# Altium PCB mcu.PcbDoc
Units mil, origin at the board's own origin, x right, y up, seen from the top; angles counter-clockwise.
Board outline 2849.19 x 1676.42 mil, 4 copper layers (Top Layer, GND, VDD, Bottom Layer), stack 23.756 mil thick; 36 components, 27 nets, 174 pads, 45 vias.
Unrouted connection lines stored in the file: 3.
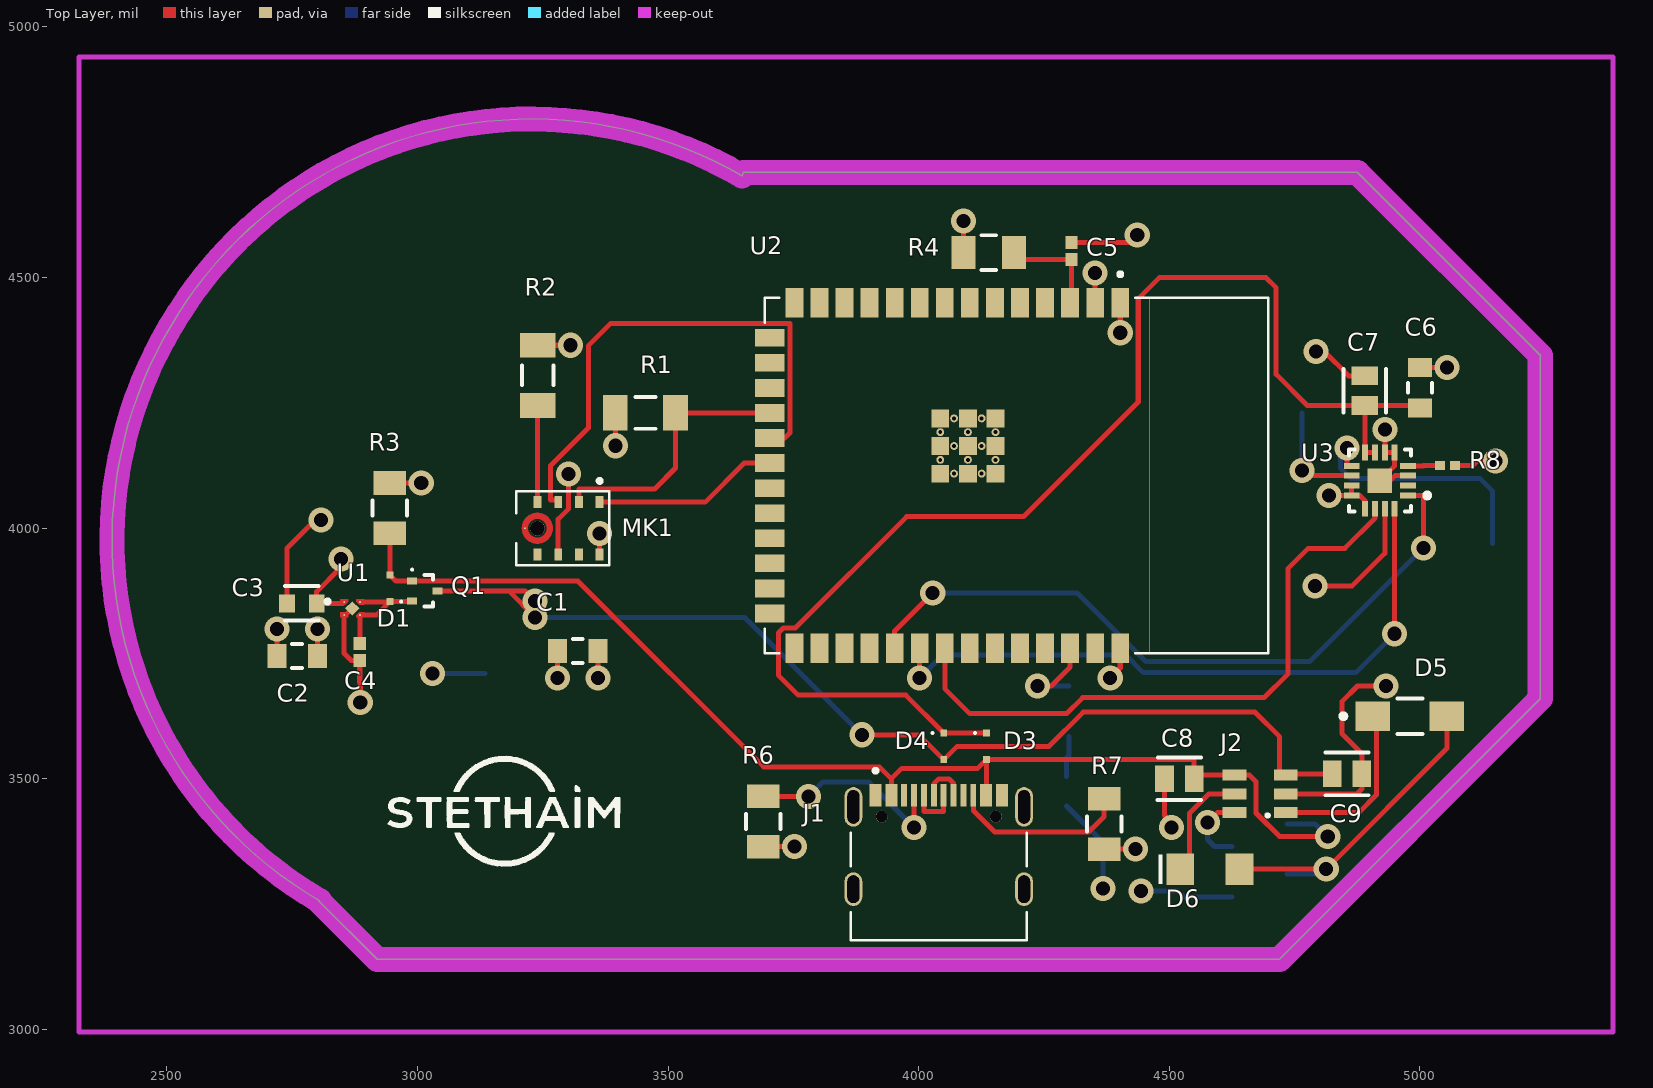
[diagram p0: Top Layer view]
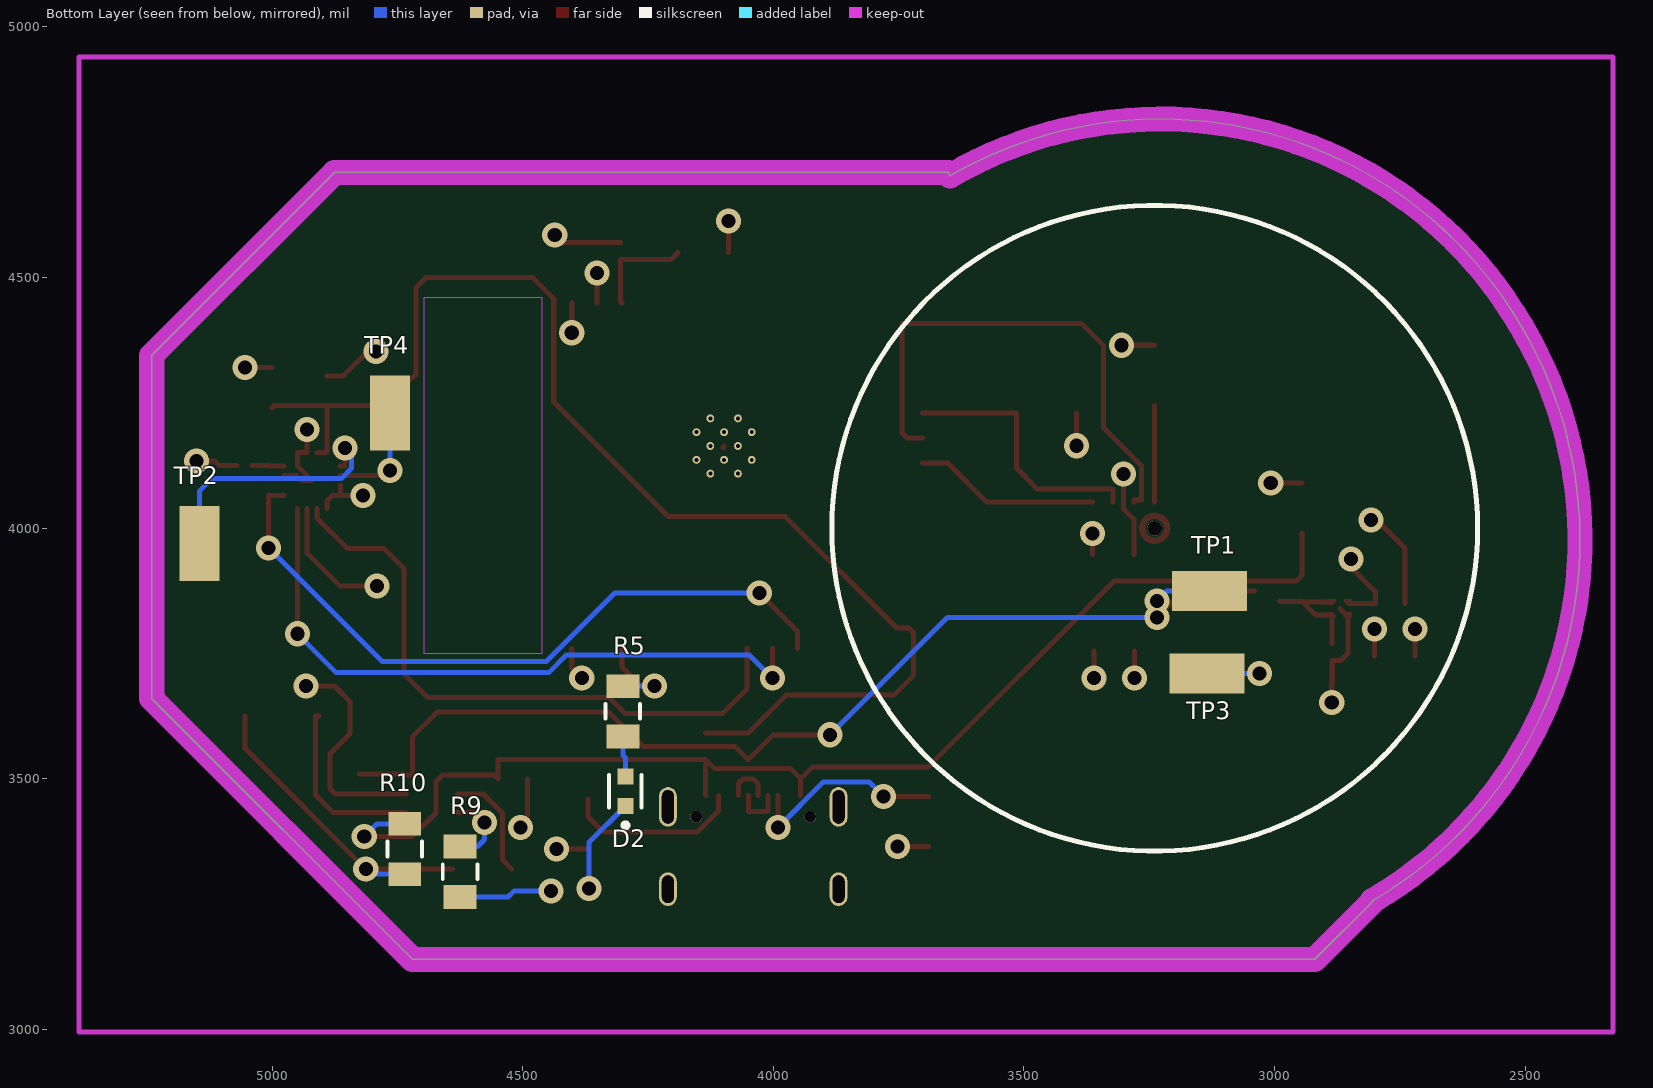
[diagram p1: Bottom Layer view, seen from below]
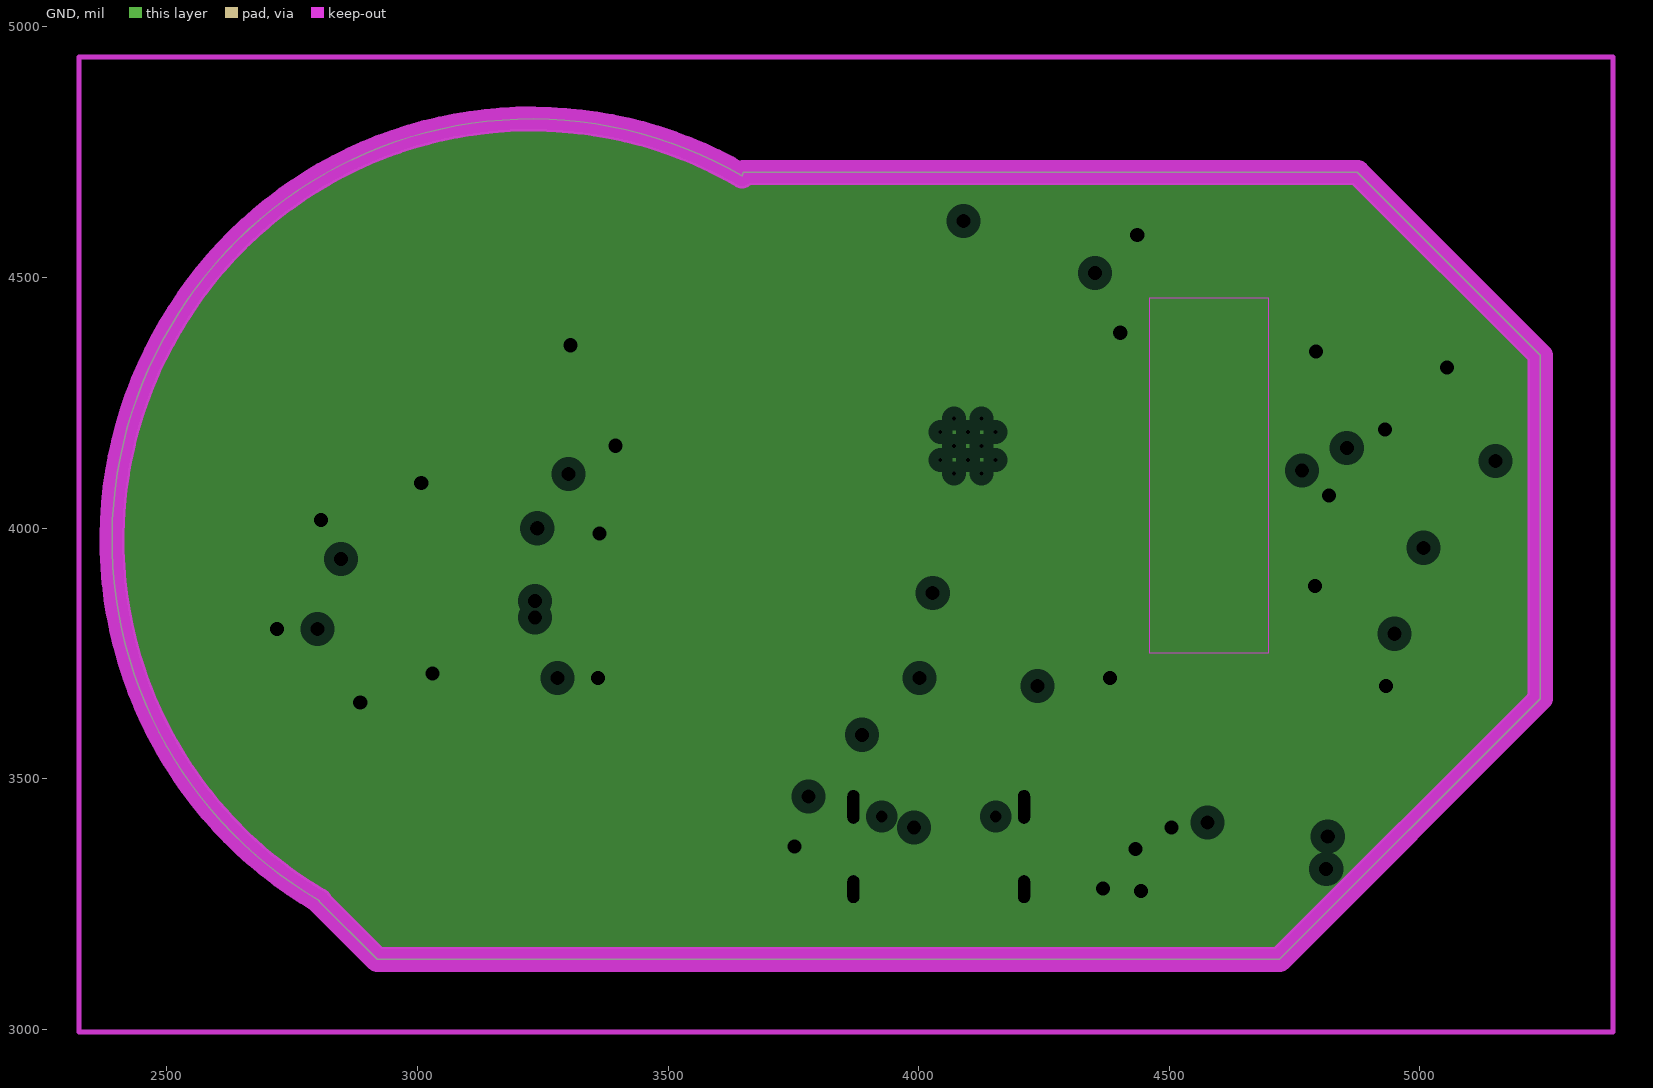
[diagram p2: GND, clearances drawn from the general rule]
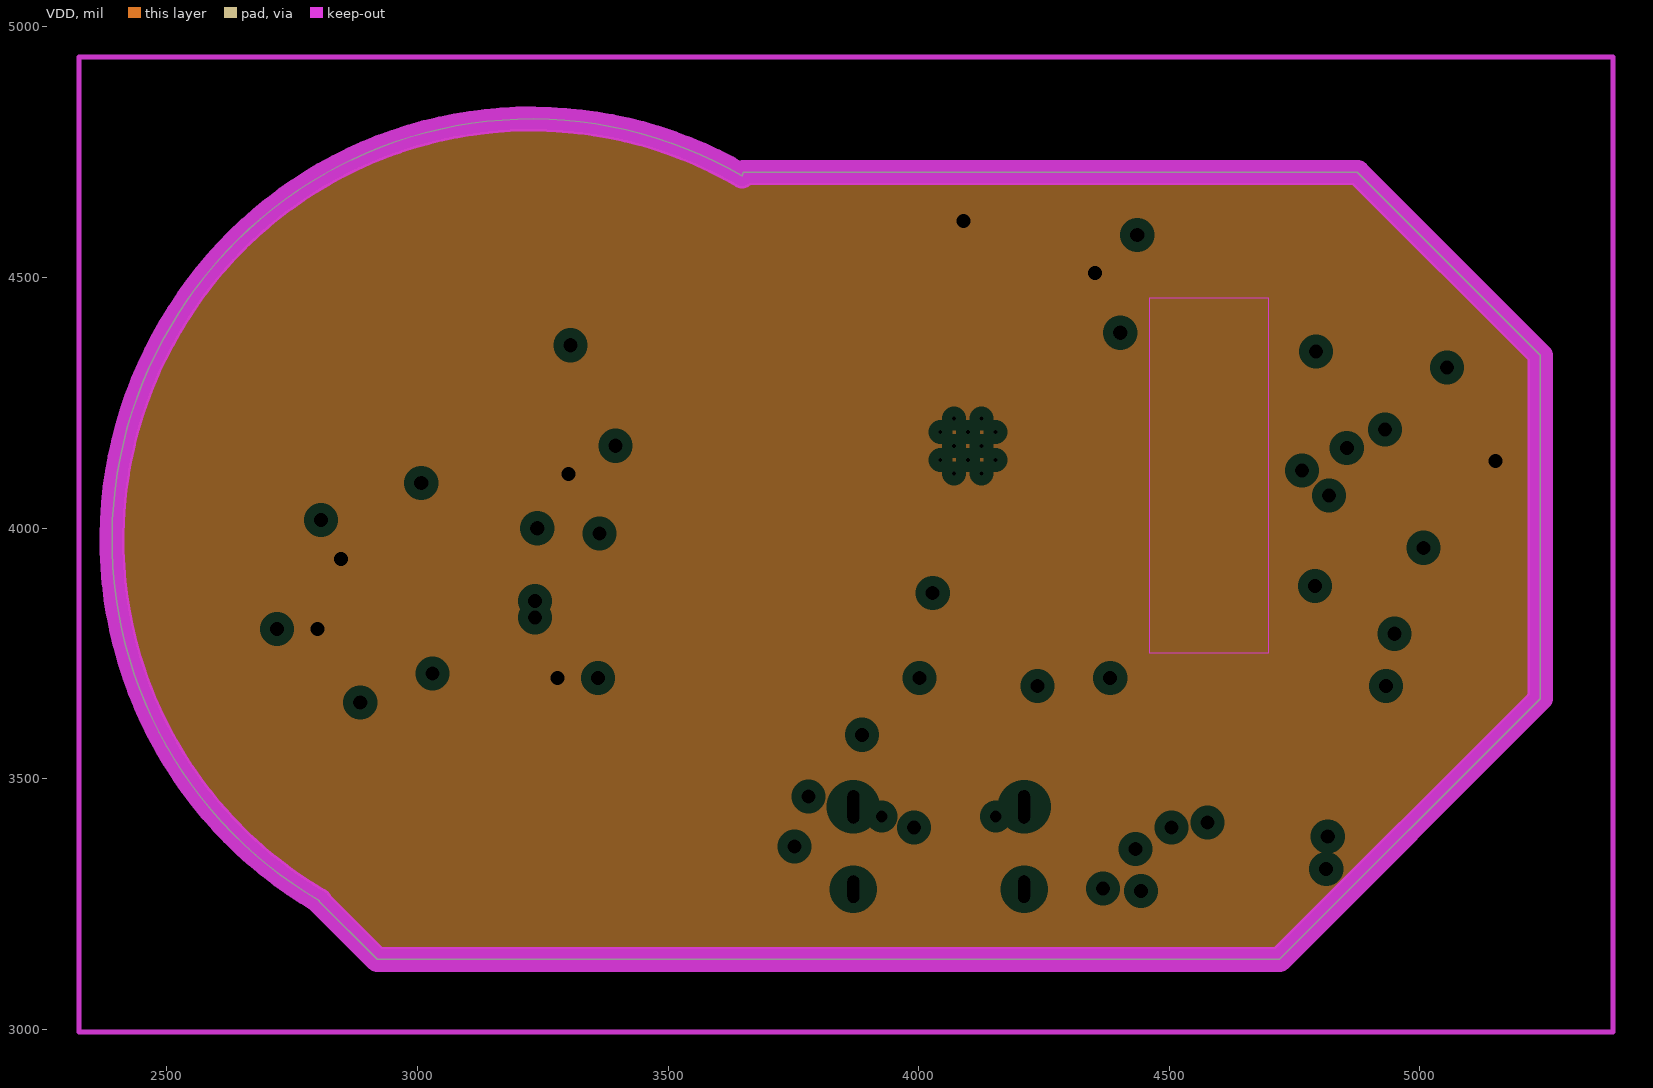
[diagram p3: VDD, clearances drawn from the general rule]
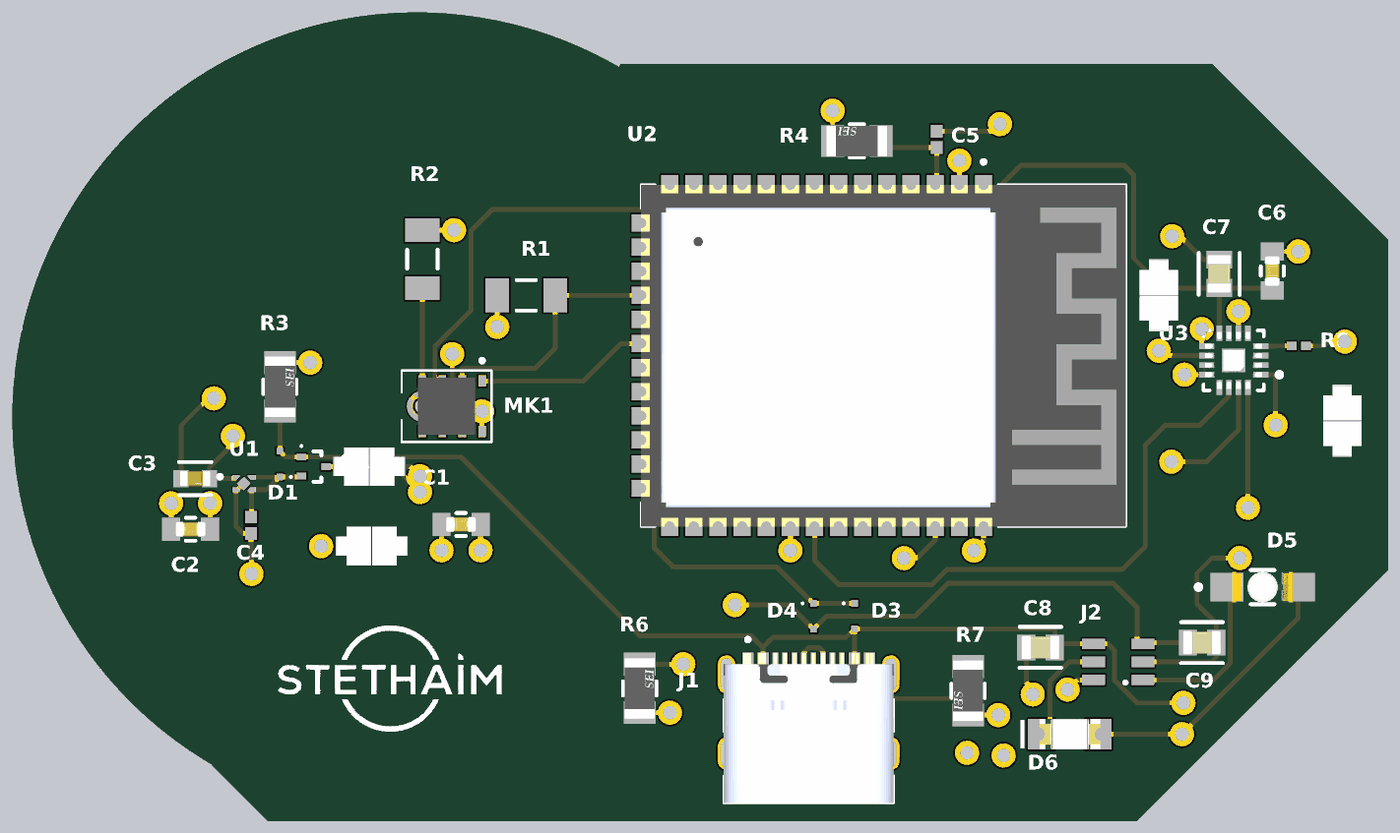
[diagram p4: 3D render of the assembled board from above, using the file's embedded part models]
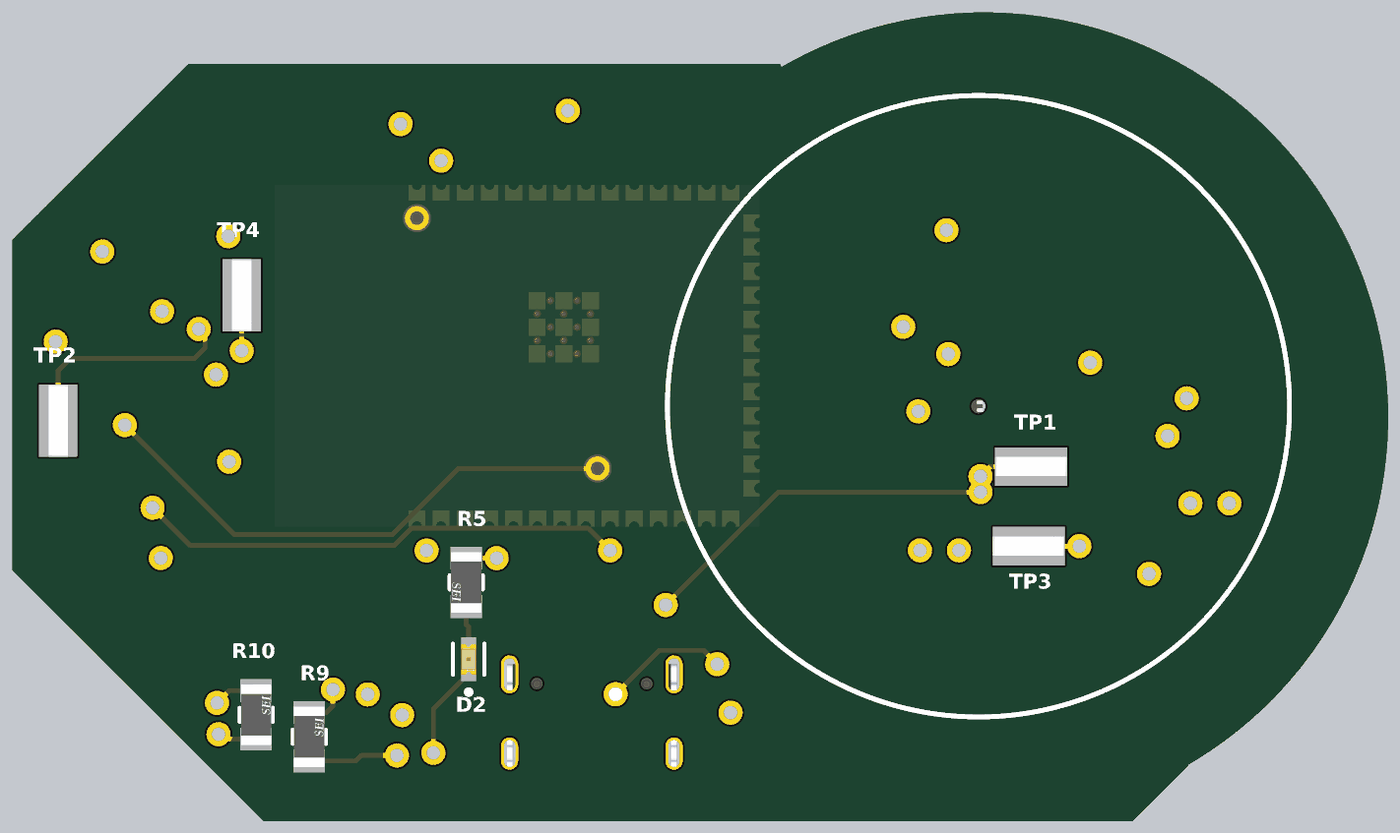
[diagram p5: 3D render of the assembled board from below, using the file's embedded part models]

## Layer stack, top to bottom
Top Solder: solder mask 0.4, Solder Resist, Dk 3.5
Top Layer: signal copper 1.4
Dielectric 2: prepreg 2.8, PP-006, Dk 4.1
GND: plane copper 1.378, net GND
Dielectric 1: dielectric 12.6, FR-4, Dk 4.8
VDD: plane copper 1.378, net VDD
Dielectric 3: prepreg 2.8, PP-006, Dk 4.1
Bottom Layer: signal copper 1.4
Bottom Solder: solder mask 0.4, Solder Resist, Dk 3.5

## Board outline
2920,3140 2804.32,3255.68 2804.32,3257.09 cw(c3224.32,3977.09) 2507.73,4402.89 cw(c3227.73,3982.89) 3647.73,4702.89 3650,4710 4270,4710 4875,4710 5240,4345 5240,3660 5235,3655 4720,3140 3675,3140

## Design rules (kind name [scope] priority, off if disabled: settings)
Clearance Clearance_1 [OnMid vs OnMid] p1: gap=5 ignorepadtopadclearanceinfootprint=FALSE sourcerule=37 cellrowname=All cellrowtype=0 cellcolname=All cellcoltype=0 innerlayers=TRUE
Clearance Clearance_2 [(ExistsOnLayer('Top Layer') Or ExistsOnLayer('Bottom Layer')) vs (ExistsOnLayer('Top Layer') Or ExistsOnLayer('Bottom Layer'))] p2: gap=5 ignorepadtopadclearanceinfootprint=FALSE sourcerule=37 cellrowname=All cellrowtype=0 cellcolname=All cellcoltype=0 outerlayers=TRUE
Clearance [All] p3: gap=10 ignorepadtopadclearanceinfootprint=FALSE ismatrix=TRUE
PlaneClearance [All] p1: clearance=20
PlaneConnect [All] p1: planeconnectstyle=Relief reliefexpansion=20 reliefentries=4 reliefconductorwidth=10 reliefairgap=10
PolygonConnect [All] p1: connectstyle=Relief reliefconductorwidth=10 reliefentries=4 polygonreliefangle="90 Angle" airgapwidth=10
RoomDefinition mcu [InComponentClass('mcu')] p1: confinementstyle=ConfineIn formatcopy=TRUE lockcomponents=FALSE outline 2315,2985 5390,2985 5390,4945 2315,4945
RoutingVias [All] p1: holewidth=28 width=50 viastyle="Through Hole" minholewidth=28 minwidth=50 maxholewidth=28 maxwidth=50
SolderMaskExpansion [All] p1: expansion=4 istentingtop=FALSE
Width [All] p1: maxlimit=10 minlimit=10 preferedwidth=10
28 further rules are at their usual default settings.

## Components (designator, comment, footprint, x,y, rotation, side; value= is the part's Value field where it differs from the comment)
C1 "100nF" FP-CGA3E-0_3-0_1-IPC_A 3320,3755 r0 top
C2 "100nF" FP-CGA3E-0_3-0_1-IPC_A 2760,3745 r180 top
C3 "22uF" FP-CC0603-DC-MFG 2769.53,3850 r180 top
C4 "C0402 1uF" CAPC1005X60X30NL05T10 2885,3753.07 r90 top
C5 "C0402 1uF" CAPC1005X60X30NL05T10 4305,4553.07 r270 top
C6 "100nF" FP-CGA3E-0_3-0_1-IPC_A 5000,4280.36 r90 top
C7 "C0805 10uF" FP-C0805C-DG-MFG 4890,4274.53 r90 top value=10uF
C8 "C0805 10uF" FP-C0805C-DG-MFG 4520,3500 r180 top value=10uF
C9 "C0805 10uF" FP-C0805C-DG-MFG 4854.53,3510 r0 top value=10uF
D1 "BAS52-02V" INF-SC79_V 2945,3880 r90 top
D2 "GPIO2" FP-LTST-C190KRKT-MFG 4295,3475.47 r90 bottom
D3 "BAS52-02V" INF-SC79_V 4135,3565 r270 top
D4 "BAS52-02V" INF-SC79_V 4050,3565 r270 top
D5 "PTD3216CGCK" FP-APTD3216CGCK-MFG 4980,3625 r0 top
D6 "150120BS75000" WL-SMCW_1206_150120xx75000 4580.94,3320 r0 top
J1 "TYPE-C-31-M-12" HRO_TYPE-C-31-M-12 4040,3280 r0 top
J2 "TP4057" SOT23-6 4681.19,3470 r90 top
MK1 "INMP441ACEZ-R7" MIC_INMP441ACEZ-R7 3290,4000 r0 top
Q1 "NTA4151PT1G" ONSC-SC-75-3-463-01_V 3015,3875 r0 top
R1 "100K" RESC3116X65X40ML10T20 3454.96,4230 r0 top
R2 "100K" RESC3116X65X40ML10T20 3240,4305 r270 top
R3 "1206 5K10" FP-RMCF1206-IPC_C 2945,4040.22 r90 top
R4 "1206 5K10" FP-RMCF1206-IPC_C 4139.78,4550 r180 top
R5 "1206 5K10" FP-RMCF1206-IPC_C 4300,3634.78 r270 bottom
R6 "1206 5K10" FP-RMCF1206-IPC_C 3690,3415 r90 top
R7 "1206 5K10" FP-RMCF1206-IPC_C 4370,3410 r270 top
R8 "RC0402FR-07634KL" RESC1005X40X25LL05T10 5055,4125 r180 top
R9 "1206 5K10" FP-RMCF1206-IPC_C 4625,3314.78 r90 bottom
R10 "1206 5K10" FP-RMCF1206-IPC_C 4735,3360.22 r90 bottom
TP1 "5019" KEYSTONE_5019 3130,3875 r180 bottom
TP2 "5019" KEYSTONE_5019 5145,3970 r270 bottom
TP3 "BATN" KEYSTONE_5019 3135,3710 r180 bottom
TP4 "5019" KEYSTONE_5019 4765,4230 r90 bottom
U1 "NCP167BMX330TBG" VREG_NCP167BMX330TBG 2870,3840 r0 top
U2 "ESP32-S3-WROOM-1-N8" XCVR_ESP32-S3-WROOM-1-N8 4195,4105 r270 top
U3 "MAX98357AETE+T" FP-T1633-4-MFG 4920,4095 r180 top

## Footprints (in the part's own frame and the unit in brackets; to place one, negate y for a bottom-side part, rotate by r counter-clockwise, add the part's x,y. Pads: shape width x height; smd on the part's side, far side on the other; paste and mask are expansions set on the pad)
CAPC1005X60X30NL05T10 [mm] "Chip Capacitor, 2-Leads, Body 1.00x0.50mm, IPC Medium Density"
  rect 0.66x0.62 smd: 1(-0.43,0) 2(0.43,0)
  body extent -0.53,-0.28 0.53,0.27, height 0.6
FP-APTD3216CGCK-MFG [mm]
  rect 1.75x1.5 smd paste+0 mask+0: 1(-1.875,0) 2(1.875,0)
  silkscreen extent -3.5,-0.9 0.62,0.9, body extent -2.85,-1 2.85,1, height 0.25
FP-C0805C-DG-MFG [mm]
  rect 0.95x1.35 smd paste+0 mask+0: 1(-0.75,0) 2(0.75,0)
  silkscreen extent -1.11,-1.08 1.1,1.08, body extent -1.4,-0.85 1.4,0.85, height 0.25
FP-CC0603-DC-MFG [mm]
  rect 0.8x0.9 smd paste+0 mask+0: 1(-0.75,0) 2(0.75,0)
  silkscreen extent -0.85,-0.87 0.85,0.87, body extent -1.43,-0.82 1.43,0.82, height 0.25
FP-CGA3E-0_3-0_1-IPC_A [mm]
  rect 0.956x1.206 smd paste+0 mask+0: 1(-1.025,0) 2(1.025,0)
  silkscreen extent -0.25,-0.6 0.25,0.6, body extent -2,-1.1 2,1.1, height 0.25
FP-LTST-C190KRKT-MFG [mm]
  rect 0.8x0.8 smd paste+0 mask+0: 1(-0.75,0) 2(0.75,0)
  silkscreen extent -1.85,-0.83 0.83,0.83, body extent -0.8,-0.4 0.8,0.4, height 0.9
FP-RMCF1206-IPC_C [mil]
  rect 47.39x65.28 smd paste+0 mask+0: 1(-50.22,0) 2(50.22,0)
  silkscreen extent -15,-34 15,34, body extent -78,-38 78,38, height 10
FP-T1633-4-MFG [mm]
  rect 0.8x0.3 smd paste+0 mask+0: 1(-1.425,0.75) 2(-1.425,0.25) 3(-1.425,-0.25) 4(-1.425,-0.75) 9(1.425,-0.75) 10(1.425,-0.25) 11(1.425,0.25) 12(1.425,0.75)
  rect 0.3x0.8 smd paste+0 mask+0: 5(-0.75,-1.425) 6(-0.25,-1.425) 7(0.25,-1.425) 8(0.75,-1.425) 13(0.75,1.425) 14(0.25,1.425) 15(-0.25,1.425) 16(-0.75,1.425)
  rect 1.23x1.23 smd paste+0 mask+0: 17(0,0)
  silkscreen extent -2.53,-1.58 1.58,1.57, body extent -1.92,-1.92 1.92,1.92, height 0.25
HRO_TYPE-C-31-M-12 [mm]
  rect 0.6x1.14 smd mask+0.05: A1_B12(-3.2,4.75) A4_B9(-2.4,4.75) B1_A12(3.2,4.75) B4_A9(2.4,4.75)
  rect 0.3x1.14 smd mask+0.05: A5(-1.25,4.75) A6(-0.25,4.75) A7(0.25,4.75) A8(1.25,4.75) B5(1.75,4.75) B6(0.75,4.75) B7(-0.75,4.75) B8(-1.75,4.75)
  oval 0.9x2 hole 0.6 slot 1.7 at 90 deg: S1(-4.325,4.17) S2(4.325,4.17)
  oval 0.9x1.7 hole 0.6 slot 1.4 at 90 deg: S3(-4.325,0) S4(4.325,0)
  round 0.6 hole 0.6 unplated: ""(-2.89,3.68) ""(2.89,3.68)
  silkscreen extent -4.47,-2.6 4.47,6.1, body extent -4.47,-2.6 4.47,5.31, height 3.31
INF-SC79_V [mm] "SC79, 2-Leads, Body 1.2x0.8 mm"
  rect 0.35x0.35 smd: 1(-0.672,0) 2(0.678,0)
  silkscreen extent -0.72,-0.62 -0.62,-0.53, body extent -0.6,-0.4 0.6,0.4, height 0.59
KEYSTONE_5019 [mm]
  rect 3.8x2.03 smd: TP(0,0)
  body extent -1.91,-1.01 1.91,1.01, height 1.14
MIC_INMP441ACEZ-R7 [mm]
  rect 0.4x0.6 smd paste-1: 1(1.87,1.33) 2(0.82,1.33) 3(-0.23,1.33) 4(-1.28,1.33) 6(-1.28,-1.33) 7(-0.23,-1.33) 8(0.82,-1.33) 9(1.87,-1.33)
  rect 0.1x0.1 smd paste-1 mask+0: 5(-1.92,0)
  round 0.75 hole 0.75 unplated: ""(-1.29,0)
  Top Layer region: 243 vertices and 0 holes, not listed, extent -2.07,-0.78 -0.51,0.78
  silkscreen extent -2.36,-1.88 2.36,2.5, body extent -1.5,-1.5 1.5,1.5, height 1
ONSC-SC-75-3-463-01_V [mil] "SOT23, 3-Leads, Body 1.6x0.8mm, Pitch 0.5mm"
  rect 20x14.02 smd: 1(-25.49,19.69) 2(-25.49,-19.69) 3(25.49,0)
  silkscreen extent -27,-31 16,44, body extent -16,-31 16,31, height 35
RESC1005X40X25LL05T10 [mm] "Chip Resistor, 2-Leads, Body 1.00x0.50mm, IPC High Density"
  rect 0.5x0.45 smd: 1(-0.375,0) 2(0.375,0)
  body extent -0.53,-0.27 0.53,0.28, height 0.4
RESC3116X65X40ML10T20 [mm] "Chip Resistor, 2-Leads, Body 3.10x1.60mm, IPC Low Density"
  rect 1.25x1.8 smd: 1(-1.525,0) 2(1.525,0)
  silkscreen extent -0.5,-0.8 0.5,0.8, body extent -1.6,-0.85 1.6,0.85, height 0.65
SOT23-6 [mm]
  rect 0.55x1.2 smd: 1(-0.95,-1.3) 2(0,-1.3) 3(0.95,-1.3) 4(0.95,1.3) 5(0,1.3) 6(-0.95,1.3)
  silkscreen extent -1.13,-0.41 -1.06,-0.34
VREG_NCP167BMX330TBG [mm]
  rect 0.1x0.1 smd paste-1 mask+0: 1(-0.405,0.325) 2(-0.405,-0.325) 3(0.405,-0.325) 4(0.405,0.325)
  rect 0.52x0.52 smd rot 45 mask+0.05: 5(0,0)
  Top Layer region: 0.6,0.195 0.36,0.195 0.21,0.345 0.21,0.455 0.6,0.455
  Top Layer region: 0.6,-0.455 0.21,-0.455 0.21,-0.345 0.36,-0.195 0.6,-0.195
  Top Layer region: -0.21,-0.345 -0.21,-0.455 -0.6,-0.455 -0.6,-0.195 -0.36,-0.195
  Top Layer region: -0.21,0.345 -0.36,0.195 -0.6,0.195 -0.6,0.455 -0.21,0.455
  silkscreen extent -1.35,0.25 -1.15,0.45
WL-SMCW_1206_150120xx75000 [mm] "SMD Mono-color Chip LED, body 3.2x1.6mm"
  rect 1.4x1.6 smd: 1(-1.5,0) 2(1.5,0)
  silkscreen extent -2.6,-0.75 -2.4,0.75, body extent -1.6,-0.8 1.6,0.8, height 0.68
XCVR_ESP32-S3-WROOM-1-N8 [mm]
  rect 1.5x0.9 smd: 1(-8.75,5.26) 2(-8.75,3.99) 3(-8.75,2.72) 4(-8.75,1.45) 5(-8.75,0.18) 6(-8.75,-1.09) 7(-8.75,-2.36) 8(-8.75,-3.63) 9(-8.75,-4.9) 10(-8.75,-6.17) 11(-8.75,-7.44) 12(-8.75,-8.71) 13(-8.75,-9.98) 14(-8.75,-11.25) 27(8.75,-11.25) 28(8.75,-9.98) 29(8.75,-8.71) 30(8.75,-7.44) 31(8.75,-6.17) 32(8.75,-4.9) 33(8.75,-3.63) 34(8.75,-2.36) 35(8.75,-1.09) 36(8.75,0.18) 37(8.75,1.45) 38(8.75,2.72) 39(8.75,3.99) 40(8.75,5.26)
  rect 0.9x1.5 smd: 15(-6.985,-12.5) 16(-5.715,-12.5) 17(-4.445,-12.5) 18(-3.175,-12.5) 19(-1.905,-12.5) 20(-0.635,-12.5) 21(0.635,-12.5) 22(1.905,-12.5) 23(3.175,-12.5) 24(4.445,-12.5) 25(5.715,-12.5) 26(6.985,-12.5)
  rect 0.9x0.9 smd: 41_1(-1.5,-2.46) 41_2(-2.9,-2.46) 41_3(-0.1,-2.46) 41_4(-2.9,-3.86) 41_5(-1.5,-3.86) 41_6(-0.1,-3.86) 41_7(-2.9,-1.06) 41_8(-1.5,-1.06) 41_9(-0.1,-1.06)
  round 0.4 hole 0.2 mask+0: 41_10(-1.5,-1.76) 41_11(-2.9,-1.76) 41_12(-0.1,-1.76) 41_13(-2.9,-3.16) 41_14(-1.5,-3.16) 41_15(-0.1,-3.16) 41_16(-2.2,-1.06) 41_17(-0.8,-1.06) 41_18(-2.2,-2.46) 41_19(-0.8,-2.46) 41_20(-2.2,-3.86) 41_21(-0.8,-3.86)
  Keep-Out Layer region: 9,6.75 -9,6.75 -9,12.75 9,12.75
  Keep-Out Layer region: 9,6.75 -9,6.75 -9,12.75 9,12.75
  silkscreen extent -10.3,-12.75 9,12.75, body extent -9,-12.75 9,12.75, height 0

## Part data
C1 C2 C6: library part CMP-2000-07546-2, "Cap Ceramic 100nF 50V X7R 10% Pad SMD 0603 +125°C Automotive T/R", Case Code (Imperial)=0603, Case Code (Metric)=1608, Dielectric=X7R, Max Operating Temperature=125°C, Min Operating Temperature=-55°C, Package Quantity=1, Ratings=AEC-Q200, Tolerance=10%, Voltage=50V, Capacitance=100nF, Case/Package=0603, Composition=Ceramic, Depth=0.8mm, Height=0.8mm, Lead Free="Lead Free", Length=1.6mm, Mount="Surface Mount", Packaging="Tape and Reel", Radiation Hardening=No, REACH SVHC="No SVHC", Termination=SMD/SMT, Thickness=0.035inch, Voltage Rating=50V, Voltage Rating (DC)=50V, Weight=7.1E-05oz, Width=0.8mm
C3: library part CMP-2000-06075-2, "CAP CER 22UF 6.3V X5R 0603", Case Code (Imperial)=0603, Case Code (Metric)=1608, Dielectric=X5R, Max Operating Temperature=85°C, Min Operating Temperature=-55°C, Package Quantity=4000, Resistor Type=Ceramic, Tolerance=20%, Voltage Rating=6.3V, Capacitance=22uF, Case/Package=0603, Depth=0.8mm, Halogen Free="Halogen Free", Lead Free="Lead Free", Length=0.063inch, Mount="Surface Mount", Packaging="Tape and Reel", RoHS Compliant=Yes, Termination=SMD/SMT, Thickness=0.035inch, Voltage Rating (DC)=6.3V, Weight=7.1E-05oz, Width=0.031inch
C4 C5: library part CMP-2008-02056-1, Manufacturer=Kemet, Part Number=C0402C105M8PACTU
C7 C8 C9: library part CMP-2007-03243-2, "CAP CER 10UF 10V X5R 0805", 3DS Part Number=220-00001, Capacitance=10uF, Manufacturer=Kemet, Manufacturer Part Number=C0805C106K8PACTU, Package=C0805C-DG, Temperature="-55°C to +85°C", Temperature Characteristic=X5R, Temperature Coefficient=15%, Temperature Range High=+85°C, Temperature Range Low=-55°C, Tolerance=10%, Voltage=10V, Automotive=No, Category=Cap, ComponentLink2Description=Datasheet, ComponentLink2URL=https://content.kemet.com/datasheets/KEM_C1006_X5R_SMD.pdf, Device Class L1="Passive Components", Device Class L2=Capacitors, Device Class L3="Ceramic Capacitors", Digikey Description="CAP CER 10UF 10V X5R 0805", Height=1.4mm, Ipc Land Pattern Name=CAPC200125X125, Lead Free=Yes, Material=Ceramic, Mouser Description="CAP CER 10UF 10V X5R 0805", Octopart=https://octopart.com/c0805c106k8pactu-kemet-98697, RoHS=TRUE, Voltage Rating=10V
D1 D3 D4: library part CMP-1183-00001-1, "Silicon Schottky Diode, SC79, Reel, Green", Manufacturer=Infineon, ComponentLink1Description="Manufacturer URL", ComponentLink1URL=http://www.infineon.com/, ComponentLink2Description=Datasheet, ComponentLink2URL=http://www.infineon.com/dgdl/bas52series.pdf?folderId=db3a30431f848401011fcbf2ab4c04c4&fileId=db3a30432d9b3066012dbc006764413f, ComponentLink3Description="Package Specification", ComponentLink3URL=http://www.infineon.com/dgdl/SC79-Package_Overview.pdf?folderId=db3a30431936bc4b011951fbddb03b15&fileId=db3a30431936bc4b01195226fe583b41, Configuration=Single, CT (max)="10Â pF", Green=TRUE, Halogen-free=TRUE, IF (max)="750Â mA", Mounting Technology="Surface Mount", PackageDescription="2-Pin Semiconductor Package, 0.8 x 1.2 mm Body", PackageReference=SC79, Packing=Reel, PartNumber=BAS52-02V, VF (max)="600Â mV", VR (max)="45Â V"
D2: library part CMP-1674-00011-2, "LED RED CLEAR CHIP SMD", Case Code (Imperial)=0603, Case Code (Metric)=1608, Color=Red, Forward Current=30mA, Forward Voltage=2.4V, Lens Color=Colorless, Max Operating Temperature=85°C, Min Operating Temperature=-55°C, Package Quantity=1, Power Dissipation=75mW, Reverse Voltage=5V, Test Current=20mA, Case/Package=0603, Depth=0.8mm, Dominant Wavelength=631nm, Height=0.8mm, Illumination Color=Red, Lead Free="Lead Free", Length=1.6mm, Lens Style=Diffused, Lens Transparency=Clear, Luminous Intensity=54mcd, Mount="Surface Mount", Number of Elements=1, Number of LEDs=1, Number of Pins=2, Packaging="Tape and Reel", Power Rating=75mW, Radiation Hardening=No, Viewing Angle=130°, Wavelength=639nm, Width=0.8mm
D5: library part CMP-2000-05792-2, "LED GREEN CLEAR 2SMD", Case Code (Imperial)=1206, Case Code (Metric)=3216, Color=Green, Forward Current=20mA, Forward Voltage=2.1V, Lens Color=Clear, Max Operating Temperature=85°C, Min Operating Temperature=-40°C, Package Quantity=2000, Case/Package=1206, Dominant Wavelength=570nm, Height=1.8mm, Illumination Color=Green, Lead Free="Lead Free", Length=3.2mm, Lens Style=Clear, Luminous Intensity=300mcd, Mount="Surface Mount", Number of LEDs=1, Number of Pins=2, Packaging="Tape and Reel", Test Current=20mA, Viewing Angle=50°, Width=1.6mm
D6: library part CMP-1426-00015-2, Case Code (Imperial)=1206, Case Code (Metric)=3216, Color=Blue, Forward Current=100mA, Forward Voltage=3.2V, Manufacturer Package Identifier=LED_1206, Max Operating Temperature=85°C, Max Reverse Voltage (DC)=5V, Min Operating Temperature=-40°C, Test Current=20mA, Case/Package=1206, Dominant Wavelength=470nm, Height=680µm, Length=3.2mm, Lens Style="Clear, Rectangular", Luminous Intensity=145mcd, Mount="Surface Mount", NexarPartId=29717786, Packaging="Tape and Reel", Peak Wavelength=465nm, REACH SVHC=Unknown, RoHS=Compliant, Viewing Angle=140°, Wavelength=470nm, Width=1.6mm
J1: library part CMP-010-000000-1, "USB Connectors 24 Receptacle 1 8.94*7.3mm RoHS", Package=Package, Availability="Not in stock", Component Type=Standard, Design Item ID=TYPE-C-31-M-12, MF="HRO Electronics Co., Ltd.", MP=TYPE-C-31-M-12, Pin Count=16, Price=None, SnapEDA_Link=https://www.snapeda.com/parts/TYPE-C-31-M-12/HRO+Electronics+Co.%252C+Ltd./view-part/?ref=snap, Source=TYPE-C-31-M-12.SchLib
J2: "<b>500mA linear li-ion battery charger</b><p> tp4057 actual charge current to 500ma, dual-lamp indication, reverse battery protection.<br> Alternative to MAX1551 or MAX1555 (not compatible!)<p> Datasheet from TP micro: <br> http://www.tpmicro.com/datasheet/TP4057Ver1.0_preview.pdf <br> http://www.tp-asic.com/te_product_a/2009-05-20/33.chtml", Package=None, Availability="Not in stock", Check_prices=https://www.snapeda.com/parts/TP4057/Top+Power/view-part/?ref=eda, MF=toppower, MP=TP4057, Price=None, SnapEDA_Link=https://www.snapeda.com/parts/TP4057/Top+Power/view-part/?ref=snap
MK1: library part CMP-006-000000-1, "60Hz ~ 15kHz Digital, IÂ²S Microphone MEMS (Silicon) 1.62V ~ 3.63V Omnidirectional (-26dB Â±3dB @ 94dB SPL) Solder Pads", Package="QFN-24 InvenSense", Availability=Bad, Component Type=Standard, Design Item ID=INMP441ACEZ-R7, MF="TDK InvenSense", MP=INMP441ACEZ-R7, Pin Count=9, Price=None, SnapEDA_Link=https://www.snapeda.com/parts/INMP441ACEZ-R7/TDK%20InvenSense/view-part/76082/?ref=snap, Source=INMP441ACEZ-R7.SchLib
Q1: library part CMP-1058-00650-1, "Small Signal MOSFET, -20 V, -760 mA, Single P-Channel, Gate Zener, 3-Pin SC75, Pb-Free, Tape and Reel", Manufacturer="On Semiconductor", Package Type=SC-75-3, Channel Polarity="P Channel", Ciss Typ (pF)=156, ComponentLink1Description="Manufacturer URL", ComponentLink1URL=http://www.onsemi.com/, ComponentLink2Description=Datasheet, ComponentLink2URL=http://www.onsemi.cn/pub_link/Collateral/NTA4151P-D.PDF, ComponentLink3Description="Package Specification", ComponentLink3URL=http://www.onsemi.com/pub_link/Collateral/463-01.PDF, Configuration=Single, Coss Typ (pF)=28, Crss Typ (pF)=18, DatasheetVersion="Rev. 7", ID Max (A)=0.76, Mounting Technology="Surface Mount", PackageDescription="3-Pin Small Outline Transistor, Body 1.6 x 0.8 mm, Pitch 0.5 mm", PackageReference=SC-75-3-463-01, PackageVersion="Rev. F, 07/2005", Packing="Tape and Reel", PartNumber=NTA4151PT1G, RoHS=Pb-Free, V(BR)DSS Min (V)=20, VGS Max (V)=6, VGS(th) Max (V)=1.2
R1 R2: library part CMP-2100-03674-1, "Chip Resistor, 100 KOhm, +/- 1%, 0.25 W, -55 to 155 degC, 1206 (3216 Metric), RoHS, Tape and Reel", Case Code (Imperial)=1206, Case Code (Metric)=3216, Manufacturer=Yageo, Max Operating Temperature=155degC, Min Operating Temperature=-55degC, Package Description="2-Pin Surface Mount Device, Body 3.1 x 1.6 mm", Package Reference=1206.0, Power Rating=250mW, Resistance=100KOhm, Temperature Coefficient=100ppm/degreesC, Tolerance=1%, Voltage Rating=200V, Case/Package=1206, Composition=ThickFilm, Datasheet URL=http://www.yageo.com/NewPortal/yageodocoutput?fileName=/pdf/R-Chip/PYu-RC_Group_51_RoHS_L_5.pdf, Datasheet Version="Rev. 5, 10/2016", Depth=1.6mm, Height=0.55mm, Lead Free=LeadFree, Length=3.1mm, Manufacturer URL=http://www.yageo.com/, Packaging=TapeandReel, REACH SVHC=NoSVHC, RoHSCompliant=true, Termination=SMD/SMT
R3 R4 R5 R6 R7 R9 R10: library part CMP-26527-004028-1, "5.1kΩ ±5% 0.25W 1206 Thick Film Chip Resistor AEC-Q200 compliant", Case Code (Imperial)=1206, Case Code (Metric)=3216, Max Operating Temperature=155°C, Max Power Dissipation=250mW, Min Operating Temperature=-55°C, Resistance=5.1kR, Resistor Type="Thick Film", Temperature Coefficient=200ppm/°C, Tolerance=5%, Case/Package=1206, Construction=Rectangular, Contact Plating=Tin, Depth=1.6mm, Features="Automotive AEC-Q200", Height=0.028inch, Lead Free="Lead Free", Length=0.126inch, Military Standard=Not, Mount="Surface Mount", Number of Terminations=2, Packaging="Tape and Reel", Power Rating=250mW, Radiation Hardening=No, RoHS Compliant=Yes, Series=RMCF, Size Code=1206, Width=0.063inch
R8: library part CMP-2002-07180-1, Manufacturer="Yageo / Phycomp", Part Number=RC0402FR-07634KL
TP1 TP2 TP4: "SMT Test Point- Mininature-1000 pc Reels", Package=None, Availability="In Stock", MF="Keystone Electronics", MP=5019, Price=None, Purchase-URL=https://pricing.snapeda.com/search/part/5019/?ref=eda
TP3: library part 5019, "SMT Test Point- Mininature-1000 pc Reels", Package=None, Availability="In Stock", MF="Keystone Electronics", MP=5019, Price=None, Purchase-URL=https://pricing.snapeda.com/search/part/5019/?ref=eda
U1: "Linear Voltage Regulator IC Positive Fixed 1 Output 700mA 4-XDFN (1x1)", Package=None, Availability="In Stock", Check_prices=https://www.snapeda.com/parts/NCP167BMX330TBG/EMI/view-part/?ref=eda, MF=onsemi, MP=NCP167BMX330TBG, Price=None, Purchase-URL=https://pricing.snapeda.com/search?q=NCP167BMX330TBG&ref=eda, SnapEDA_Link=https://www.snapeda.com/parts/NCP167BMX330TBG/EMI/view-part/?ref=snap
U2: library part CMP-008-000000-2, "<a href=\"https://pricing.snapeda.com/parts/ESP32S3WROOM1N8R8/Espressif%20Systems/view-part?ref=eda\">Check availability</a>  <a href=\"https://pricing.snapeda.com/parts/ESP32-S3-WROOM-1-N8R8/Espressif%20Systems/view-part?ref=eda\">Check availability</a>", Package=None, Availability=Unavailable, Component Type=Standard, Design Item ID=ESP32-S3-WROOM-1-N8, MF="{'manufacturer': u'Espressif Systems'}", MP=ESP32-S3-WROOM-1-N8, Pin Count=49, Price=None, Source=ESP32-S3-WROOM-1-N8.SchLib
U3: library part CMP-05698-000018-1, "IC AMP CLASS D MONO 3.2W 16TQFN", Max Operating Temperature=85°C, Max Output Current=1.6A, Max Output Power=3.2W, Max Power Dissipation=1.666W, Max Supply Voltage=5.5V, Min Operating Temperature=-40°C, Min Supply Voltage=2.5V, Power Supply Rejection Ratio (PSRR)=77dB, Voltage Gain=15dB, Contact Plating=Tin, Mount="Surface Mount", Number of Pins=16, Packaging="Tape and Reel", Radiation Hardening=No, RoHS Compliant=Yes, Series=-

## Via types
v1: diameter 50, hole 28, Top Layer to Bottom Layer, 45 vias

## Nets (pads, with @x,y where several pads share a name; then routed paths per layer and width w, separated by ;. In a path a pad name is that pad's centre, name@x,y a point inside that pad or via, vN(x,y) a via of type N, cw(c..) or ccw(c..) an arc to the next point about the centre after c; other vN are vias at no path point)
AMP_POWER: C6.1 C7.1 D3.1 D4.1 U3.7 U3.8 | length 2564
  Top Layer w10: D3.1 D4.1 3974.45,3667 3760,3667 3720,3707 3720,3791 3730,3801 3754,3801 3976,4023 4209,4023 4438,4252 4438,4458 4480,4500 4693,4500 4713,4480 4713,4307 4775,4245 C7.1 ; U3.7 U3.8 4890.47,4197 4890,4197.47 C7.1 ; C6.1 4995,4245 C7.1
BATP: C9.1 D4.2 J2.3 Q1.3 TP1.TP | length 2235.7
  Top Layer w10: Q1.3 3182,3875 ; v1(3235,3822) 3182,3875 ; v1(3235,3855) 3215,3875 3182,3875 ; v1(3887,3588) 4000.3,3588 D4.2 4076.7,3565 4260,3565 4328,3633 4671,3633 4720,3584 4720,3507.4 J2.3 4734.97,3510 C9.1
  Bottom Layer w10: TP1.TP 3215,3875 v1(3235,3855) ; v1(3235,3822) 3653,3822 v1(3887,3588)
GND: C1.2 C2.2 C3.2 C4.1 C5.1 C6.2 C7.2 C8.2 C9.2 D2.1 J1.A1_B12 J1.B1_A12 J1.S1 J1.S2 J1.S3 J1.S4 J2.2 MK1.9 R1.1 R2.1 R3.2 R6.1 R7.2 R9.1 TP3.TP U1.2 U1.5 U2.1 U2.40 U2.41_1 U3.3 U3.5 U3.6 U3.11 U3.12 U3.13 U3.15 U3.17 | length 2927.6
  Top Layer w10: C2.2 v1(2719.65,3798.75) ; C3.2 2740,3960 2796.43,4016.43 v1(2808,4016.43) ; U1.5 2857.2,3827.2 U1.2 2854.05,3750 2867.91,3736.14 C4.1 2885,3693.72 2886,3692.72 v1(2886,3652.44) ; R3.2 v1(3007.64,4090.44) ; R2.1 v1(3305.43,4365.04) ; v1(3360.35,3701.25) C1.2 ; MK1.9 v1(3363.62,3989.45) ; v1(3394.92,4164.57) R1.1 ; R6.1 v1(3752.64,3364.78) ; U2.41_1 4100,4162.2 U2.41_1@4100,4160 ; C5.1 4421,4570 v1(4436,4585) ; R7.2 v1(4432.64,3359.78) ; v1(4382.09,3700.98) 4402.09,3720.98 U2.40 ; v1(4402.09,4389.96) U2.1 ; C8.2 4490.47,3427.06 4504,3413.54 v1(4504,3402.71) ; J2.2 4874.05,3470 4884.05,3480 C9.2 4884.05,3550.72 4844.05,3590.72 4844.05,3654.05 4875.29,3685.29 v1(4932.53,3685.29) ; v1(4791,3885) 4864.84,3885 4929.84,3950 U3.15 ; v1(4792.71,4352.53) 4809.26,4352.53 4857.73,4304.06 C7.2 ; v1(4818.15,4065.47) U3.12@4863,4065.47 ; U3.11 4863,4085.16 U3.12@4863,4065.47 ; U3.13 4890.47,4055 4880,4065.47 U3.12 U3.12@4863,4065.47 ; v1(4929.84,4196.85) U3.6 4929.84,4151 U3.5@4949.53,4151 ; U3.5 U3.5@4949.53,4151 ; U3.3 4950,4104.84 4940.16,4095 U3.17 4949.53,4124.53 U3.5@4949.53,4151 ; C6.2 v1(5053.75,4320.71)
  Bottom Layer w10: v1(3030.2,3710) TP3.TP ; D2.1 4368,3372.94 v1(4368,3281.48) ; v1(4443.64,3276) 4517.71,3276 4529.15,3264.56 R9.1
IO2: R5.1 U2.38 | length 181.2
  Top Layer w10: v1(4237,3685) 4263.91,3685 4302.09,3723.17 U2.38
  Bottom Layer w10: v1(4237,3685) R5.1
IO38: U2.31 U3.1 | length 1407.1
  Top Layer w10: U2.31 3952.09,3795.09 v1(4028,3871) ; U3.1 5007,4065.47 v1(5007,3961)
  Bottom Layer w10: v1(4028,3871) 4316.03,3871 4453.03,3734 4780,3734 v1(5007,3961)
IO39: U2.32 U3.16 | length 1322
  Top Layer w10: v1(4002,3701.09) 4002.09,3701.17 U2.32 ; v1(4949.53,3789.53) U3.16
  Bottom Layer w10: v1(4002,3701.09) 4047.91,3747 4413,3747 4448,3712 4872,3712 v1(4949.53,3789.53)
IO40: U2.33 U3.14 | length 1262.8
  Top Layer w10: U2.33 4052.09,3680 4102.09,3630 4295,3630 4327,3662 4689,3662 4737,3710 4737,3920 4777,3960 4850.16,3960 4910.16,4020 U3.14
NetC4_2: C4.2 D1.1 Q1.2 U1.3 U1.4 | length 232.1
  Top Layer w10: C4.2 2885.94,3770.94 U1.3 2918.65,3827.2 D1.1 2987.74,3853.55 Q1.2 ; U1.4@2885.98,3852.83 2944.21,3852.83 D1.1
NetC5_2: C5.2 R4.1 U2.3 | length 208.6
  Top Layer w10: R4.1 4203.86,4536.14 C5.2 4305,4452.4 U2.3
NetD2_2: D2.2 R5.2 | length 81.6
  Bottom Layer w10: D2.2 4295,3542 4300,3547 R5.2
NetD5_1: D5.1 J2.1 | length 359.1
  Top Layer w10: J2.1 4877.6,3432.6 4913,3468 4913,3625 D5.1
NetD5_2: D5.2 D6.2 R10.1 | length 659.9
  Top Layer w10: D6.2 v1(4813,3320) 5053.82,3560.82 D5.2
  Bottom Layer w10: R10.1 4803,3310 v1(4813,3320)
NetD6_1: D6.1 J2.5 | length 224.7
  Top Layer w10: D6.1 4540,3338.11 4540,3431.05 4578.95,3470 J2.5
NetJ1_A5: J1.A5 R6.2 | length 414.4
  Top Layer w10: R6.2 v1(3780.22,3465.22) ; v1(3990.79,3403) J1.A5
  Bottom Layer w10: v1(3780.22,3465.22) 3809,3494 3899.79,3494 v1(3990.79,3403)
NetJ1_B5: J1.B5 R7.1 | length 356.9
  Top Layer w10: J1.B5 4108.9,3437.1 4152,3394 4339,3394 4370,3425 R7.1
NetJ2_6: J2.6 R9.2 | length 150.7
  Top Layer w10: v1(4576,3412.6) 4596,3432.6 J2.6
  Bottom Layer w10: v1(4576,3412.6) 4576,3379 4590,3365 R9.2
NetMK1_4: MK1.4 R2.2 | length 192.8
  Top Layer w10: MK1.4 3239.61,4148 3240,4148.39 R2.2
NetR8_2: R8.2 U3.4 | length 64.3
  Top Layer w10: U3.4 5007,4124.53 5007.47,4125 R8.2
SCK: MK1.1 U2.20 | length 371.9
  Top Layer w10: MK1.1 3363.62,4052 3574,4052 3652,4130 U2.20
SD: MK1.2 R1.2 U2.18 | length 533.8
  Top Layer w10: MK1.2 3322.28,4078.32 3473.32,4078.32 3515,4120 R1.2 U2.18
SPKN: TP2.TP U3.9 | length 519.6
  Top Layer w10: v1(4854,4160) 4854,4124.53 U3.9
  Bottom Layer w10: v1(4854,4160) 4851,4160 4841,4150 4841,4120 4862,4099 5120,4099 5145,4074 TP2.TP
SPKP: TP4.TP U3.10 | length 218.1
  Top Layer w10: v1(4765,4115) 4775.16,4104.84 U3.10
  Bottom Layer w10: v1(4765,4115) TP4.TP
USB_5V: C8.1 D1.2 D3.2 J1.A4_B9 J1.B4_A9 J2.4 Q1.1 R3.1 R10.2 | length 2463.3
  Top Layer w10: R3.1 D1.2 2957.01,3894.69 Q1.1 3320,3894.69 3690.69,3524 3921.51,3524 3945.51,3500 ; J1.A4_B9 3945.51,3500 ; J1.B4_A9 4134.99,3467.53 D3.2 ; v1(4816,3385) 4720,3385 4673,3432 4673,3494.4 4660,3507.4 4556.93,3507.4 C8.1 4549.53,3538.3 D3.2 ; 3945.51,3500 3966.51,3521 4117.7,3521 D3.2
  Bottom Layer w10: R10.2 4790.56,3410.44 v1(4816,3385)
USB_D+: J1.A6 J1.B6 | length 94.2
  Top Layer w10: J1.A6 4030.16,3490 4040.16,3500 4060.53,3500 4069.53,3491 J1.B6
USB_D-: J1.A7 J1.B7 | length 104.3
  Top Layer w10: J1.B7 4010.47,3434.56 4049.84,3434.56 J1.A7
VDD: C1.1 C2.1 C3.1 MK1.7 R4.2 R8.1 U1.1 U2.2 | length 647.7
  Top Layer w10: C2.1 v1(2800.36,3798.75) ; v1(2847.53,3938.43) 2847.53,3921.88 2799.05,3873.41 C3.1 2851.26,3850 U1.1 ; v1(3279.64,3701.25) C1.1 ; MK1.7 3280.94,4018.04 3301.61,4038.71 v1(3301.61,4108.16) ; R4.2 v1(4089.56,4612.64) ; U2.2 v1(4352.09,4509.02) ; R8.1 5105.03,4125 5114.03,4134 v1(5150.32,4134)
WS: MK1.3 U2.19 | length 1040.1
  Top Layer w10: MK1.3 3280.94,4056 3266,4056 3266,4125 3341,4200 3341,4364 3385,4408 3743,4408 3743,4190 3733,4180 U2.19
pads on no net: J1. J1.A8 J1.B8 MK1. MK1.5 MK1.6 MK1.8 U2.4 U2.5 U2.6 U2.7 U2.8 U2.9 U2.10 U2.11 U2.12 U2.13 U2.14 U2.15 U2.16 U2.17 U2.21 U2.22 U2.23 U2.24 U2.25 U2.26 U2.27 U2.28 U2.29 U2.30 U2.34 U2.35 U2.36 U2.37 U2.39 U2.41_2 U2.41_3 U2.41_4 U2.41_5 U2.41_6 U2.41_7 U2.41_8 U2.41_9 U2.41_10 U2.41_11 U2.41_12 U2.41_13 U2.41_14 U2.41_15 U2.41_16 U2.41_17 U2.41_18 U2.41_19 U2.41_20 U2.41_21 U3.2

## Polygon pours and split planes (outlines as drawn)
GND on GND (split plane): 153 vertices, not listed, extent 2410.78,3160.1 5219.9,4796.42
VDD on VDD (split plane): 153 vertices, not listed, extent 2410.78,3160.1 5219.9,4796.42

## Keep-outs
Keep-Out Layer:
  lines w10: 2325,2995 5385,2995 5385,4940 2325,4940 2325,2995
  lines w50: 3647.73,4702.89 ccw(c3227.73,3982.89) 2507.73,4402.89 ccw(c3224.32,3977.09) 2804.32,3257.09 2804.32,3255.68 2920,3140 3675,3140 4720,3140 5235,3655 5240,3660 5240,4343.12 5240,4345 4875,4710 4280,4710 ; 3650,4710 4270,4710

## Silkscreen, mask and mechanical layers (free items; w line width, h text height)
Top Overlay:
  drawing of 11 lines, arcs and shapes, not listed
Bottom Overlay:
  circle w10: c3239.21,4000 r644.17

## Text inside footprints (layer, text, board x,y; h text height)
J1: Top 3D Body "PCB EDGE" at 4340,3220 h24
U2: Top 3D Body "ANTENNA" at 4569.02,4282.17 h50 r270